# Altium PCB XPIMU_1V1.PCBDOC (part 2 of 3)
Units mil, origin at the board's own origin, x right, y up, seen from the top; angles counter-clockwise.
Board outline 1578.8 x 1145.73 mil, 6 copper layers (Top Layer, Internal Plane 1, Mid-Layer 1, Mid-Layer 2, Mid-Layer 3, Bottom Layer); 139 components, 101 nets, 532 pads, 256 vias.
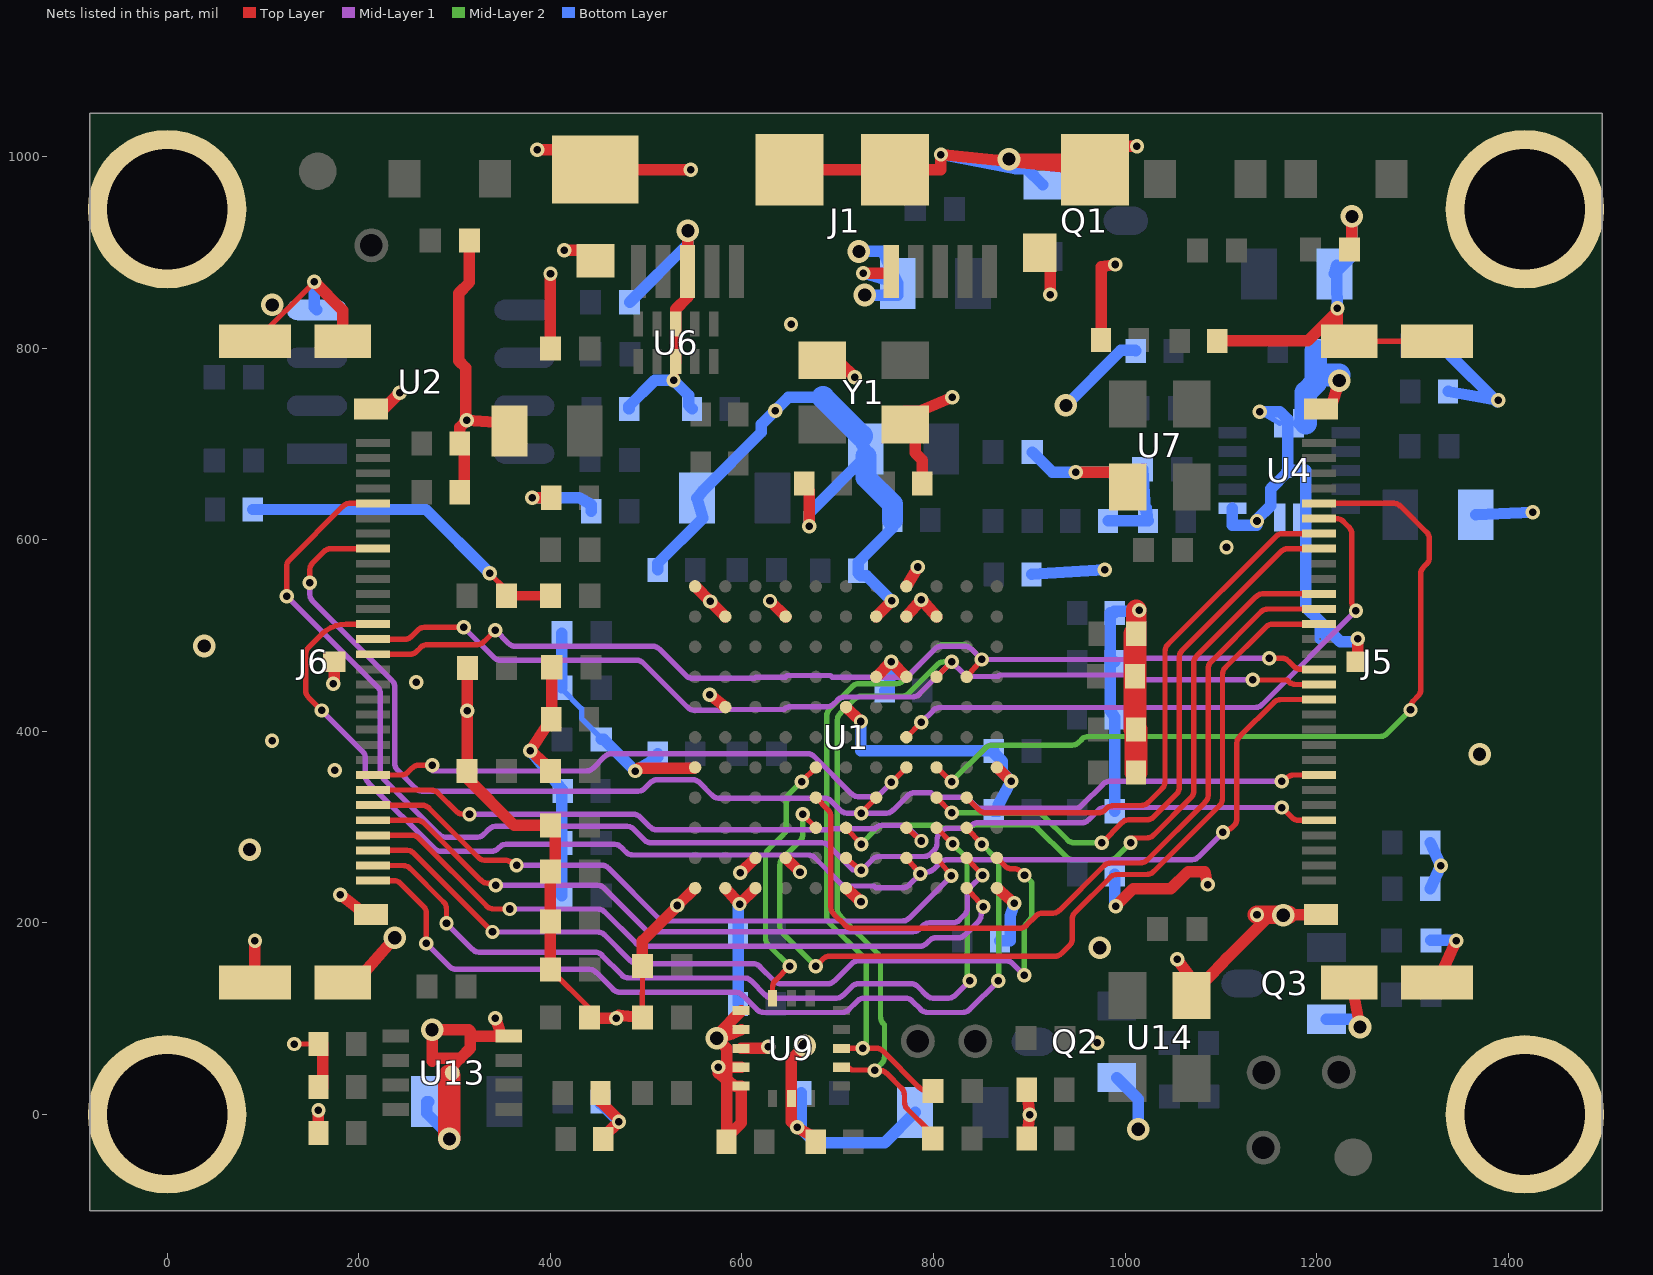
[diagram p6: the nets of this part, all layers, seen from the top]

## Via types
v1: diameter 15, hole 7.87, Top Layer to Bottom Layer, 205 vias
v2: diameter 23.62, hole 13.78, Top Layer to Bottom Layer, 41 vias
v3: diameter 0, hole 0, Top Layer to Bottom Layer, 6 vias
v4: diameter 19, hole 9.84, Top Layer to Bottom Layer, 4 vias

## Nets (pads, with @x,y where several pads share a name; then routed paths per layer and width w, separated by ;. In a path a pad name is that pad's centre, name@x,y a point inside that pad or via, vN(x,y) a via of type N, cw(c..) or ccw(c..) an arc to the next point about the centre after c; other vN are vias at no path point) (continued)
CMOS_D4: J5.26 U1.G9 | length 847.1
  Top Layer w5.6: U1.G9@803.15,362.2 v1(818.9,347.38) ; J5.26@1202.39,637.8 1280.6,637.8 cw(c1280.6,628) 1287.53,634.92 1314.79,607.67 cw(c1307.86,600.74) 1317.66,600.74 1317.66,581.5 cw(c1307.86,581.5) 1314.79,574.57 1311.53,571.31 ccw(c1318.46,564.38) 1308.66,564.38 1308.66,443.5 cw(c1298.86,443.5) 1305.79,436.57 1300.79,431.57 ccw(c1307.72,424.64) 1297.92,424.64 v1(1297.92,422.2)
  Mid-Layer 2 w5.6: v1(818.9,347.38) 854.09,382.57 cw(c861.02,375.64) 861.02,385.44 944.6,385.44 ccw(c944.6,395.24) 951.53,388.31 954.79,391.57 cw(c961.72,384.64) 961.72,394.44 1266.1,394.44 ccw(c1266.1,404.24) 1273.03,397.31 v1(1297.92,422.2)
CMOS_D5: J5.25 U1.F8 | length 647.1
  Top Layer w5.6: U1.F8@771.65,393.7 v1(787.4,409.45) ; J5.25@1202.39,622.05 1220.6,622.05 cw(c1220.6,612.25) 1227.53,619.18 1233.79,612.92 cw(c1226.86,605.99) 1236.66,605.99 1236.66,534.24 ccw(c1246.46,534.24) 1239.53,527.32 v1(1240.96,525.88)
  Mid-Layer 1 w5.6: v1(787.4,409.45) 799.79,421.84 cw(c806.72,414.91) 806.72,424.71 1135.73,424.71 ccw(c1135.73,434.51) 1142.66,427.58 v1(1240.96,525.88)
CMOS_D6: J5.24 U1.H10 | length 576.5
  Top Layer w5.6: U1.H10@834.65,330.71 847.57,317.78 ccw(c854.5,324.71) 854.5,314.91 972.17,314.91 ccw(c972.17,324.71) 979.1,317.78 980.89,319.57 cw(c987.82,312.64) 987.82,322.44 1016.85,322.44 ccw(c1016.85,332.24) 1023.78,325.31 1038.79,340.32 ccw(c1031.86,347.25) 1041.66,347.25 1041.66,483.38 cw(c1051.46,483.38) 1044.53,490.31 1157.65,603.43 cw(c1164.58,596.5) 1164.58,606.3 J5.24@1202.39,606.3
CMOS_D7: J5.23 U1.H9 | length 627.4
  Top Layer w5.6: U1.H9@803.15,330.71 v1(819.01,314.9) ; v1(975.66,283.44) 996.79,304.57 cw(c1003.72,297.64) 1003.72,307.44 1022.6,307.44 ccw(c1022.6,317.24) 1029.53,310.31 1053.79,334.57 ccw(c1046.86,341.5) 1056.66,341.5 1056.66,477.38 cw(c1066.46,477.38) 1059.53,484.31 1162.9,587.68 cw(c1169.83,580.75) 1169.83,590.55 J5.23@1202.39,590.55
  Mid-Layer 2 w5.6: v1(819.01,314.9) 907.46,314.9 cw(c907.46,305.1) 914.39,312.03 940.12,286.31 ccw(c947.04,293.24) 947.04,283.44 v1(975.66,283.44)
CMOS_D8: J6.30 U1.J10 | length 924.7
  Top Layer w5.6: J6.30@214.93,244.09 236.6,244.09 cw(c236.6,234.29) 243.53,241.22 267.79,216.96 cw(c260.86,210.04) 270.66,210.04 v1(270.66,178.44) ; U1.J10@834.65,299.21 v1(850.39,282.2)
  Mid-Layer 1 w5.6: v1(270.66,178.44) 294.79,154.31 ccw(c301.72,161.24) 301.72,151.44 440.6,151.44 cw(c440.6,141.64) 447.53,148.57 465.79,130.31 ccw(c472.72,137.24) 472.72,127.44 593.6,127.44 cw(c593.6,117.64) 600.53,124.57 615.79,109.31 ccw(c622.72,116.24) 622.72,106.44 704.6,106.44 ccw(c704.6,116.24) 711.53,109.31 720.79,118.57 cw(c727.72,111.64) 727.72,121.44 770.6,121.44 cw(c770.6,111.64) 777.53,118.57 786.79,109.31 ccw(c793.72,116.24) 793.72,106.44 830.6,106.44 ccw(c830.6,116.24) 837.53,109.31 v1(867.66,139.44)
  Mid-Layer 2 w5.6: v1(850.39,282.2) 865.25,267.35 cw(c858.32,260.42) 868.12,260.42 868.12,139.9 v1(867.66,139.44)
CMOS_D9: J6.29 U1.J9 | length 880.2
  Top Layer w5.6: J6.29@214.93,259.84 246.39,259.84 cw(c246.39,250.04) 253.32,256.97 288.79,221.5 cw(c281.86,214.57) 291.66,214.57 v1(291.66,199.44) ; U1.J9@803.15,299.21 v1(819.9,282.43)
  Mid-Layer 1 w5.6: v1(291.66,199.44) 318.79,172.31 ccw(c325.72,179.24) 325.72,169.44 446.6,169.44 cw(c446.6,159.64) 453.53,166.57 474.79,145.31 ccw(c481.72,152.24) 481.72,142.44 602.6,142.44 cw(c602.6,132.64) 609.53,139.57 624.79,124.31 ccw(c631.72,131.24) 631.72,121.44 698.6,121.44 ccw(c698.6,131.24) 705.53,124.31 714.79,133.57 cw(c721.72,126.64) 721.72,136.44 776.6,136.44 cw(c776.6,126.64) 783.53,133.57 792.79,124.31 ccw(c799.72,131.24) 799.72,121.44 815.6,121.44 ccw(c815.6,131.24) 822.53,124.31 v1(837.66,139.44)
  Mid-Layer 2 w5.6: v1(819.9,282.43) 834.93,267.4 834.93,235.18 835.39,234.71 835.39,141.71 v1(837.66,139.44)
CMOS_D10: J6.28 U1.K11 | length 895.5
  Top Layer w5.6: J6.28@214.93,275.59 250.45,275.59 cw(c250.45,265.79) 257.38,272.72 v1(339.66,190.44) ; U1.K11@866.14,267.72 874.55,259.31 ccw(c881.48,266.24) 881.48,256.44 884.08,256.44 cw(c884.08,246.64) 891.01,253.57 v1(895.01,249.58)
  Mid-Layer 1 w5.6: v1(339.66,190.44) 449.6,190.44 cw(c449.6,180.64) 456.53,187.57 483.79,160.31 ccw(c490.72,167.24) 490.72,157.44 611.6,157.44 cw(c611.6,147.64) 618.53,154.57 633.79,139.31 ccw(c640.72,146.24) 640.72,136.44 689.6,136.44 ccw(c689.6,146.24) 696.53,139.31 714.79,157.57 cw(c721.72,150.64) 721.72,160.44 875.6,160.44 cw(c875.6,150.64) 882.53,157.57 v1(894.66,145.44)
  Mid-Layer 2 w5.6: v1(894.66,145.44) 894.66,193.02 cw(c904.46,193.02) 897.53,199.95 899.85,202.27 ccw(c892.92,209.2) 902.72,209.2 902.72,241.86 v1(895.01,249.58)
CMOS_D11: J6.27 U1.L10 | length 730.8
  Top Layer w5.6: J6.27@214.93,291.34 255.7,291.34 cw(c255.7,281.54) 262.63,288.47 333.79,217.31 ccw(c340.72,224.24) 340.72,214.44 v1(357.66,214.44) ; U1.L10@834.65,236.22 v1(851.88,216.73)
  Mid-Layer 1 w5.6: v1(357.66,214.44) 449.6,214.44 cw(c449.6,204.64) 456.53,211.57 489.79,178.31 ccw(c496.72,185.24) 496.72,175.44 785.6,175.44 ccw(c785.6,185.24) 792.53,178.31 795.79,181.57 cw(c802.72,174.64) 802.72,184.44 825.88,184.44 ccw(c825.88,194.24) 832.81,187.31 846.79,201.29 ccw(c839.86,208.22) 849.66,208.22 849.66,214.51 v1(851.88,216.73)
CMOS_D12: J6.26 U1.K10 | length 742.7
  Top Layer w5.6: J6.26@214.93,307.09 260.96,307.09 cw(c260.96,297.29) 267.89,304.22 327.79,244.31 ccw(c334.72,251.24) 334.72,241.44 340.73,241.44 v1(343.07,239.1) ; U1.K10@834.65,267.72 v1(851.16,249.67)
  Mid-Layer 1 w5.6: v1(343.07,239.1) 449.21,239.1 cw(c449.21,229.3) 456.14,236.23 498.75,193.62 ccw(c505.68,200.55) 505.68,190.75 778.65,190.75 ccw(c778.65,200.55) 785.58,193.62 788.97,197.02 cw(c795.9,190.09) 795.9,199.89 819.95,199.89 ccw(c819.95,209.69) 826.88,202.76 832.52,208.4 ccw(c825.59,215.33) 835.39,215.33 835.39,229.84 cw(c845.19,229.84) 838.26,236.77 v1(851.16,249.67)
CMOS_D13: J6.25 U1.K9 | length 696.3
  Top Layer w5.6: J6.25@214.93,322.83 266.21,322.83 cw(c266.21,313.03) 273.14,319.96 324.79,268.31 ccw(c331.72,275.24) 331.72,265.44 352.79,265.44 cw(c352.79,255.64) 359.72,262.57 363.46,258.83 v1(364.78,260.15) ; U1.K9@803.15,267.72 v1(818.69,249.01)
  Mid-Layer 1 w5.6: v1(364.78,260.15) 453.74,260.15 cw(c453.74,250.35) 460.67,257.28 513.22,204.72 ccw(c520.15,211.65) 520.15,201.85 767.48,201.85 ccw(c767.48,211.65) 774.41,204.72 v1(818.69,249.01)
CMOS_D14: J6.24 U1.J8 | length 616.6
  Top Layer w5.6: J6.24@214.93,338.58 275.6,338.58 cw(c275.6,328.78) 282.53,335.71 301.93,316.31 ccw(c308.86,323.24) 308.86,313.44 v1(315.66,313.44) ; U1.J8@771.65,299.21 v1(787.42,285.42)
  Mid-Layer 1 w5.6: v1(315.66,313.44) 486.6,313.44 cw(c486.6,303.64) 493.53,310.57 504.03,300.07 ccw(c510.96,307) 510.96,297.2 693.53,297.2 694.62,298.29 738.77,298.29 739.27,298.79 cw(c746.2,291.86) 746.2,301.66 767.13,301.66 cw(c767.13,291.86) 774.05,298.79 v1(787.42,285.42)
CMOS_D15: J6.23 U1.G8 | length 602.3
  Top Layer w5.6: J6.23@214.93,354.33 244.49,354.33 ccw(c244.49,364.13) 251.42,357.2 255.79,361.57 cw(c262.72,354.64) 262.72,364.44 v1(276.66,364.44) ; v1(756.1,346.56) U1.G8@771.65,362.2 U1.G8@771.65,362.2
  Mid-Layer 1 w5.6: v1(276.66,364.44) 277.22,363.88 277.22,358.44 437.6,358.44 ccw(c437.6,368.24) 444.53,361.31 456.79,373.57 cw(c463.72,366.64) 463.72,376.44 668.6,376.44 cw(c668.6,366.64) 675.53,373.57 714.47,334.63 ccw(c721.4,341.56) 721.4,331.76 737.24,331.76 ccw(c737.24,341.56) 744.17,334.63 v1(756.1,346.56)
CMOS_HD: J5.18 U1.J5 | length 969.7
  Top Layer w5.6: v1(663.66,313.44) 663.66,312.72 U1.J5@677.17,299.21 ; v1(677.05,154.75) 684.47,162.17 cw(c691.4,155.24) 691.4,165.04 926.62,165.04 ccw(c926.62,174.84) 933.55,167.91 941.99,176.35 ccw(c935.06,183.28) 944.86,183.28 944.86,203.79 cw(c954.66,203.79) 947.73,210.72 984.58,247.57 cw(c991.51,240.64) 991.51,250.44 1022.6,250.44 ccw(c1022.6,260.24) 1029.53,253.31 1098.79,322.57 ccw(c1091.86,329.5) 1101.66,329.5 1101.66,459.38 cw(c1111.46,459.38) 1104.53,466.31 1147.16,508.94 cw(c1154.09,502.01) 1154.09,511.81 J5.18@1202.39,511.81
  Mid-Layer 2 w5.6: v1(663.66,313.44) 663.66,292.31 cw(c653.86,292.31) 660.79,285.38 642.53,267.12 ccw(c649.46,260.19) 639.66,260.19 639.66,196.2 ccw(c649.46,196.2) 642.53,189.27 v1(677.05,154.75)
CMOS_OE: J5.8 J6.8 U1.H7 | length 1450.7
  Top Layer w5.6: v1(149.08,554.88) 149.08,568.8 ; J6.8@214.93,590.55 170.83,590.55 ; v1(724.72,314.55) U1.H7@740.16,330.71 ; v1(1163.33,347.96) 1171.3,352.87 cw(c1176.44,344.53) 1176.44,354.33 J5.8@1202.39,354.33 ; 149.08,568.8 cw(c158.88,568.8) 151.95,575.73 ; 149.08,568.8 cw(c158.88,568.8) 151.95,575.73 ; 151.95,575.73 163.9,587.68 ; 163.9,587.68 cw(c170.83,580.75) 170.83,590.55 ; 163.9,587.68 cw(c170.83,580.75) 170.83,590.55
  Mid-Layer 1 w5.6: v1(149.08,554.88) 149.08,542.73 ; v1(1163.33,347.96) 984.24,347.96 ccw(c984.24,338.16) 977.31,345.09 954.53,322.31 cw(c947.6,329.24) 947.6,319.44 850.35,319.44 cw(c850.35,329.24) 843.42,322.31 837.46,328.27 ccw(c830.53,321.34) 830.53,331.14 806.02,331.14 cw(c806.02,340.94) 799.09,334.01 797.23,335.87 780.15,335.87 ccw(c780.15,326.07) 773.22,333 757.64,317.42 cw(c750.71,324.35) 750.71,314.55 v1(724.72,314.55) 709.72,314.55 ; 149.08,542.73 ccw(c158.88,542.73) 151.95,535.8 ; 149.08,542.73 ccw(c158.88,542.73) 151.95,535.8 ; 151.95,535.8 234.79,452.96 ; 234.79,452.96 cw(c227.86,446.03) 237.66,446.03 ; 234.79,452.96 cw(c227.86,446.03) 237.66,446.03 ; 237.66,366.28 ccw(c247.46,366.28) 240.53,359.35 ; 237.66,366.28 ccw(c247.46,366.28) 240.53,359.35 ; 237.66,366.28 237.66,446.03 ; 240.53,359.35 259.57,340.31 ; 259.57,340.31 ccw(c266.5,347.24) 266.5,337.44 ; 259.57,340.31 ccw(c266.5,347.24) 266.5,337.44 ; 266.5,337.44 491.6,337.44 ; 491.6,337.44 ccw(c491.6,347.24) 498.53,340.31 ; 491.6,337.44 ccw(c491.6,347.24) 498.53,340.31 ; 498.53,340.31 504.79,346.57 ; 504.79,346.57 cw(c511.72,339.64) 511.72,349.44 ; 504.79,346.57 cw(c511.72,339.64) 511.72,349.44 ; 511.72,349.44 548.6,349.44 ; 548.6,349.44 cw(c548.6,339.64) 555.53,346.57 ; 548.6,349.44 cw(c548.6,339.64) 555.53,346.57 ; 555.53,346.57 569.05,333.05 ; 569.05,333.05 ccw(c575.98,339.98) 575.98,330.18 ; 569.05,333.05 ccw(c575.98,339.98) 575.98,330.18 ; 575.98,330.18 685.97,330.18 ; 685.97,330.18 cw(c685.97,320.38) 692.9,327.31 ; 685.97,330.18 cw(c685.97,320.38) 692.9,327.31 ; 692.9,327.31 702.79,317.42 ; 702.79,317.42 ccw(c709.72,324.35) 709.72,314.55 ; 702.79,317.42 ccw(c709.72,324.35) 709.72,314.55
CMOS_PCLK: J5.20 U1.J6 | length 723.9
  Top Layer w5.6: U1.J6@708.66,299.21 v1(724.46,282.02) ; v1(1005.66,283.44) 1005.66,288.54 1022.6,288.54 ccw(c1022.6,298.34) 1029.53,291.41 1068.79,330.67 ccw(c1061.86,337.6) 1071.66,337.6 1071.66,471.38 cw(c1081.46,471.38) 1074.53,478.31 1136.66,540.44 cw(c1143.59,533.51) 1143.59,543.31 J5.20@1202.39,543.31
  Mid-Layer 2 w5.6: v1(724.46,282.02) 741.23,298.79 cw(c748.16,291.86) 748.16,301.66 801.72,301.66 801.84,301.54 ccw(c808.77,308.47) 808.77,298.67 836.2,298.67 836.73,299.19 cw(c843.66,292.26) 843.66,302.06 901.25,302.06 cw(c901.25,292.26) 908.18,299.19 938.68,268.69 ccw(c945.61,275.62) 945.61,265.82 983.99,265.82 ccw(c983.99,275.62) 990.91,268.69 v1(1005.66,283.44)
CMOS_RST: J5.13 J6.13 U1.K8 | length 1554.9
  Top Layer w5.6: v1(161.25,421.68) 147.53,435.39 ; J6.13@214.93,511.81 186.78,511.81 ; U1.K8@771.65,267.72 v1(786.22,251.04) ; v1(1102.16,294.35) 1109.91,298.35 ccw(c1105.42,307.06) 1112.35,300.13 1113.79,301.57 ccw(c1106.86,308.5) 1116.66,308.5 1116.66,387.38 cw(c1126.46,387.38) 1119.53,394.31 1155.42,430.2 cw(c1162.35,423.27) 1162.35,433.07 J5.13@1202.39,433.07 ; 144.66,442.32 ccw(c154.46,442.32) 147.53,435.39 ; 144.66,442.32 ccw(c154.46,442.32) 147.53,435.39 ; 144.66,442.32 144.66,480.38 ; 144.66,480.38 cw(c154.46,480.38) 147.53,487.31 ; 144.66,480.38 cw(c154.46,480.38) 147.53,487.31 ; 147.53,487.31 161.6,501.38 ; 161.6,501.38 cw(c186.78,476.19) 186.78,511.81 ; 161.6,501.38 cw(c186.78,476.19) 186.78,511.81
  Mid-Layer 1 w5.6: v1(161.25,421.68) 204.14,378.78 ; v1(1102.16,294.35) 1076.61,268.81 cw(c1069.68,275.74) 1069.68,265.94 814.08,265.94 ccw(c814.08,256.14) 807.15,263.07 799.93,255.85 cw(c793,262.78) 795.32,253.26 v1(786.22,251.04) 774.58,239.4 ; 204.14,378.78 cw(c197.21,371.85) 207.01,371.85 ; 204.14,378.78 cw(c197.21,371.85) 207.01,371.85 ; 207.01,353.5 ccw(c216.81,353.5) 209.88,346.57 ; 207.01,353.5 ccw(c216.81,353.5) 209.88,346.57 ; 207.01,353.5 207.01,371.85 ; 209.88,346.57 278.93,277.52 ; 278.93,277.52 ccw(c285.86,284.45) 285.86,274.65 ; 278.93,277.52 ccw(c285.86,284.45) 285.86,274.65 ; 285.86,274.65 338.53,274.65 ; 338.53,274.65 ccw(c338.53,284.45) 345.46,277.52 ; 338.53,274.65 ccw(c338.53,284.45) 345.46,277.52 ; 345.46,277.52 346.97,279.03 ; 346.97,279.03 cw(c353.9,272.1) 353.9,281.9 ; 346.97,279.03 cw(c353.9,272.1) 353.9,281.9 ; 353.9,281.9 466.9,281.9 ; 466.9,281.9 cw(c466.9,272.1) 473.83,279.03 ; 466.9,281.9 cw(c466.9,272.1) 473.83,279.03 ; 473.83,279.03 479.21,273.66 ; 479.21,273.66 ccw(c486.14,280.59) 486.14,270.79 ; 479.21,273.66 ccw(c486.14,280.59) 486.14,270.79 ; 486.14,270.79 669.13,270.79 ; 669.13,270.79 cw(c669.13,260.99) 676.06,267.92 ; 669.13,270.79 cw(c669.13,260.99) 676.06,267.92 ; 676.06,267.92 702.71,241.27 ; 702.71,241.27 ccw(c709.64,248.2) 709.64,238.4 ; 702.71,241.27 ccw(c709.64,248.2) 709.64,238.4 ; 709.64,238.4 738.03,238.4 739.9,236.53 767.65,236.53 ; 767.65,236.53 ccw(c767.65,246.33) 774.58,239.4 ; 767.65,236.53 ccw(c767.65,246.33) 774.58,239.4
CMOS_VD: J5.19 U1.H5 | length 857.5
  Top Layer w5.6: U1.H5@677.17,330.71 690.06,317.82 cw(c683.13,310.89) 692.93,310.89 692.93,216.23 ccw(c702.73,216.23) 695.8,209.3 707.99,197.12 ccw(c714.92,204.05) 714.92,194.25 889.83,194.25 ccw(c889.83,204.05) 896.76,197.12 906.93,207.29 cw(c913.86,200.36) 913.86,210.16 924.57,210.16 ccw(c924.57,219.96) 931.5,213.03 978.04,259.57 cw(c984.97,252.64) 984.97,262.44 1015.84,262.44 ccw(c1015.84,272.24) 1022.77,265.31 1083.79,326.33 ccw(c1076.86,333.26) 1086.66,333.26 1086.66,465.38 cw(c1096.46,465.38) 1089.53,472.31 1141.91,524.69 cw(c1148.84,517.76) 1148.84,527.56 J5.19@1202.39,527.56
EXPOSURE: J5.5 J6.5 U1.K6 | length 1537.8
  Top Layer w5.6: v1(124.74,541.07) 124.74,571.81 ; J6.5@214.93,637.8 190.72,637.8 ; U1.K6@708.66,267.72 v1(724.72,254.63) ; v1(1163.66,320.34) 1174.04,309.96 ccw(c1180.97,316.89) 1180.97,307.09 J5.5@1202.39,307.09 ; 124.74,571.81 cw(c134.54,571.81) 127.61,578.74 ; 124.74,571.81 cw(c134.54,571.81) 127.61,578.74 ; 127.61,578.74 183.79,634.92 ; 183.79,634.92 cw(c190.72,628) 190.72,637.8 ; 183.79,634.92 cw(c190.72,628) 190.72,637.8
  Mid-Layer 1 w5.6: v1(124.74,541.07) 219.79,446.01 ; 839.44,301.54 cw(c832.51,308.47) 832.51,298.67 815.36,298.67 ccw(c815.36,288.87) 808.43,295.8 806.53,293.89 ccw(c813.46,286.96) 803.66,286.96 803.66,282.75 cw(c793.86,282.75) 800.79,275.82 797.02,272.05 cw(c790.09,278.98) 790.09,269.18 743.33,269.18 ccw(c743.33,259.38) 736.4,266.31 v1(724.72,254.63) 723.91,255.45 715.65,255.45 690.53,280.57 ; 839.48,301.57 cw(c846.41,294.64) 846.41,304.44 954.76,304.44 ccw(c954.76,314.24) 961.69,307.31 971.85,317.46 cw(c978.77,310.54) 978.77,320.34 v1(1163.66,320.34) ; 219.79,446.01 cw(c212.86,439.09) 222.66,439.09 ; 219.79,446.01 cw(c212.86,439.09) 222.66,439.09 ; 222.66,357.68 ccw(c232.46,357.68) 225.53,350.75 ; 222.66,357.68 ccw(c232.46,357.68) 225.53,350.75 ; 222.66,357.68 222.66,439.09 ; 225.53,350.75 283.97,292.31 ; 283.97,292.31 ccw(c290.9,299.24) 290.9,289.44 ; 283.97,292.31 ccw(c290.9,299.24) 290.9,289.44 ; 290.9,289.44 323.6,289.44 ; 323.6,289.44 ccw(c323.6,299.24) 330.53,292.31 ; 323.6,289.44 ccw(c323.6,299.24) 330.53,292.31 ; 330.53,292.31 335.97,297.75 ; 335.97,297.75 cw(c342.9,290.82) 342.9,300.62 ; 335.97,297.75 cw(c342.9,290.82) 342.9,300.62 ; 342.9,300.62 480.12,300.62 ; 480.12,300.62 cw(c480.12,290.82) 487.05,297.75 ; 480.12,300.62 cw(c480.12,290.82) 487.05,297.75 ; 487.05,297.75 498.49,286.31 ; 498.49,286.31 ccw(c505.42,293.24) 505.42,283.44 ; 498.49,286.31 ccw(c505.42,293.24) 505.42,283.44 ; 505.42,283.44 683.6,283.44 ; 683.6,283.44 cw(c683.6,273.64) 690.53,280.57 ; 683.6,283.44 cw(c683.6,273.64) 690.53,280.57
FX3_SCL: J5.14 J6.14 R26.2 U1.D9 U9.2 | length 2016.4
  Top Layer w5.6: J6.14@214.93,496.06 248.22,496.06 ; v1(309.66,508.44) 268.72,508.44 ; U9.2@704.02,49.21 707.83,49.21 cw(c707.83,39.41) 714.76,46.34 738.27,46.34 v1(738.72,45.89) 744.04,45.89 cw(c744.04,36.09) 750.97,43.02 766.85,27.14 cw(c759.92,20.21) 769.72,20.21 769.72,12.76 ccw(c779.52,12.76) 772.59,5.83 795.79,-17.38 cw(c788.86,-24.31) 798.66,-24.31 798.66,-24.7 R26.2@799.2,-25.23 ; U1.D9@803.15,456.69 v1(818.9,472.44) ; v1(1133.42,453.85) 1133.42,453.44 1169.04,453.44 1170.79,451.69 ccw(c1177.72,458.62) 1177.72,448.82 J5.14@1202.39,448.82 ; 248.22,496.06 ccw(c248.22,505.86) 255.15,498.93 ; 248.22,496.06 ccw(c248.22,505.86) 255.15,498.93 ; 248.22,496.06 ccw(c248.22,505.86) 255.15,498.93 ; 248.22,496.06 ccw(c248.22,505.86) 255.15,498.93 ; 255.15,498.93 261.79,505.57 ; 261.79,505.57 cw(c268.72,498.64) 268.72,508.44 ; 261.79,505.57 cw(c268.72,498.64) 268.72,508.44 ; 261.79,505.57 cw(c268.72,498.64) 268.72,508.44 ; 261.79,505.57 cw(c268.72,498.64) 268.72,508.44
  Mid-Layer 1 w5.6: v1(309.66,508.44) 341.09,477.01 ; v1(1133.42,453.85) 1020.22,453.85 cw(c1020.22,463.65) 1013.29,456.72 1011.34,458.68 869.08,458.68 867.59,457.18 838.22,457.18 cw(c838.22,466.98) 831.29,460.05 v1(818.9,472.44) 785.07,438.61 ; 341.09,477.01 ccw(c348.02,483.94) 348.02,474.14 ; 341.09,477.01 ccw(c348.02,483.94) 348.02,474.14 ; 341.09,477.01 ccw(c348.02,483.94) 348.02,474.14 ; 341.09,477.01 ccw(c348.02,483.94) 348.02,474.14 ; 348.02,474.14 490.1,474.14 ; 490.1,474.14 cw(c490.1,464.34) 497.03,471.27 ; 490.1,474.14 cw(c490.1,464.34) 497.03,471.27 ; 490.1,474.14 cw(c490.1,464.34) 497.03,471.27 ; 490.1,474.14 cw(c490.1,464.34) 497.03,471.27 ; 497.03,471.27 543.47,424.84 ; 543.47,424.84 ccw(c550.4,431.77) 550.4,421.97 ; 543.47,424.84 ccw(c550.4,431.77) 550.4,421.97 ; 543.47,424.84 ccw(c550.4,431.77) 550.4,421.97 ; 543.47,424.84 ccw(c550.4,431.77) 550.4,421.97 ; 550.4,421.97 582.91,421.97 583.66,422.71 644.04,422.71 644.14,422.82 ; 644.14,422.82 cw(c651.07,415.89) 651.07,425.69 ; 644.14,422.82 cw(c651.07,415.89) 651.07,425.69 ; 644.14,422.82 cw(c651.07,415.89) 651.07,425.69 ; 644.14,422.82 cw(c651.07,415.89) 651.07,425.69 ; 651.07,425.69 688.93,425.69 ; 688.93,425.69 ccw(c688.93,435.49) 695.86,428.56 ; 688.93,425.69 ccw(c688.93,435.49) 695.86,428.56 ; 688.93,425.69 ccw(c688.93,435.49) 695.86,428.56 ; 688.93,425.69 ccw(c688.93,435.49) 695.86,428.56 ; 695.86,428.56 700.17,432.87 ; 700.17,432.87 cw(c707.1,425.94) 707.1,435.74 ; 700.17,432.87 cw(c707.1,425.94) 707.1,435.74 ; 700.17,432.87 cw(c707.1,425.94) 707.1,435.74 ; 700.17,432.87 cw(c707.1,425.94) 707.1,435.74 ; 707.1,435.74 778.14,435.74 ; 778.14,435.74 ccw(c778.14,445.54) 785.07,438.61 ; 778.14,435.74 ccw(c778.14,445.54) 785.07,438.61 ; 778.14,435.74 ccw(c778.14,445.54) 785.07,438.61 ; 778.14,435.74 ccw(c778.14,445.54) 785.07,438.61
  Mid-Layer 2 w5.6: v1(738.72,45.89) 745.92,53.09 ; v1(818.9,472.44) 811.03,472.44 ; 699.66,214.14 ccw(c709.46,214.14) 702.53,207.21 ; 699.66,214.14 ccw(c709.46,214.14) 702.53,207.21 ; 699.66,214.14 699.66,411.38 ; 699.66,411.38 cw(c709.46,411.38) 702.53,418.31 ; 699.66,411.38 cw(c709.46,411.38) 702.53,418.31 ; 702.53,207.21 741.79,167.95 ; 702.53,418.31 717.79,433.57 ; 717.79,433.57 cw(c724.72,426.64) 724.72,436.44 ; 717.79,433.57 cw(c724.72,426.64) 724.72,436.44 ; 724.72,436.44 766.91,436.44 ; 741.79,167.95 cw(c734.86,161.02) 744.66,161.02 ; 741.79,167.95 cw(c734.86,161.02) 744.66,161.02 ; 744.66,101.77 ccw(c754.46,101.77) 747.53,94.84 ; 744.66,101.77 ccw(c754.46,101.77) 747.53,94.84 ; 744.66,101.77 744.66,161.02 ; 745.92,53.09 ccw(c738.99,60.02) 748.79,60.02 ; 745.92,53.09 ccw(c738.99,60.02) 748.79,60.02 ; 747.53,94.84 748.79,93.59 748.79,60.02 ; 766.91,436.44 ccw(c766.91,446.24) 773.84,439.31 ; 766.91,436.44 ccw(c766.91,446.24) 773.84,439.31 ; 773.84,439.31 804.1,469.57 ; 804.1,469.57 cw(c811.03,462.64) 811.03,472.44 ; 804.1,469.57 cw(c811.03,462.64) 811.03,472.44
FX3_SDA: J5.15 J6.15 R25.2 U1.D10 U9.3 | length 2005.3
  Top Layer w5.6: J6.15@214.93,480.31 253.48,480.31 ; v1(342.66,505.44) 330.53,493.31 ; U9.3@704.02,68.9 725.85,68.9 v1(726.05,69.09) 740.2,69.09 cw(c740.2,59.29) 747.13,66.22 785.04,28.31 ccw(c791.97,35.24) 791.97,25.44 R25.2@799.46,24.54 ; U1.D10@834.65,456.69 v1(850.39,474.92) ; v1(1150.52,476.22) 1163.6,476.22 cw(c1163.6,466.42) 1170.53,473.35 1176.44,467.44 ccw(c1183.37,474.37) 1183.37,464.57 J5.15@1202.39,464.57 ; 253.48,480.31 ccw(c253.48,490.11) 260.41,483.19 ; 253.48,480.31 ccw(c253.48,490.11) 260.41,483.19 ; 253.48,480.31 ccw(c253.48,490.11) 260.41,483.19 ; 253.48,480.31 ccw(c253.48,490.11) 260.41,483.19 ; 260.41,483.19 264.79,487.57 ; 264.79,487.57 cw(c271.72,480.64) 271.72,490.44 ; 264.79,487.57 cw(c271.72,480.64) 271.72,490.44 ; 264.79,487.57 cw(c271.72,480.64) 271.72,490.44 ; 264.79,487.57 cw(c271.72,480.64) 271.72,490.44 ; 271.72,490.44 323.6,490.44 ; 323.6,490.44 ccw(c323.6,500.24) 330.53,493.31 ; 323.6,490.44 ccw(c323.6,500.24) 330.53,493.31 ; 323.6,490.44 ccw(c323.6,500.24) 330.53,493.31 ; 323.6,490.44 ccw(c323.6,500.24) 330.53,493.31
  Mid-Layer 1 w5.6: v1(342.66,505.44) 356.52,491.58 ; v1(1150.52,476.22) 1001.11,476.22 999.8,474.92 v1(850.39,474.92) 839.5,485.81 ; 356.52,491.58 ccw(c363.45,498.51) 363.45,488.71 ; 356.52,491.58 ccw(c363.45,498.51) 363.45,488.71 ; 356.52,491.58 ccw(c363.45,498.51) 363.45,488.71 ; 356.52,491.58 ccw(c363.45,498.51) 363.45,488.71 ; 363.45,488.71 506.85,488.71 ; 506.85,488.71 cw(c506.85,478.91) 513.78,485.84 ; 506.85,488.71 cw(c506.85,478.91) 513.78,485.84 ; 506.85,488.71 cw(c506.85,478.91) 513.78,485.84 ; 506.85,488.71 cw(c506.85,478.91) 513.78,485.84 ; 513.78,485.84 541.6,458.02 ; 541.6,458.02 ccw(c548.53,464.95) 548.53,455.15 ; 541.6,458.02 ccw(c548.53,464.95) 548.53,455.15 ; 541.6,458.02 ccw(c548.53,464.95) 548.53,455.15 ; 541.6,458.02 ccw(c548.53,464.95) 548.53,455.15 ; 548.53,455.15 583.62,455.15 583.66,455.19 613.08,455.19 614.21,456.31 645.16,456.31 647.01,458.16 692.42,458.16 694.38,456.2 767.84,456.2 ; 767.84,456.2 ccw(c767.84,466) 774.77,459.07 ; 767.84,456.2 ccw(c767.84,466) 774.77,459.07 ; 767.84,456.2 ccw(c767.84,466) 774.77,459.07 ; 767.84,456.2 ccw(c767.84,466) 774.77,459.07 ; 774.77,459.07 801.5,485.81 ; 801.5,485.81 cw(c808.43,478.88) 808.43,488.68 ; 801.5,485.81 cw(c808.43,478.88) 808.43,488.68 ; 801.5,485.81 cw(c808.43,478.88) 808.43,488.68 ; 801.5,485.81 cw(c808.43,478.88) 808.43,488.68 ; 808.43,488.68 832.57,488.68 ; 832.57,488.68 cw(c832.57,478.88) 839.5,485.81 ; 832.57,488.68 cw(c832.57,478.88) 839.5,485.81 ; 832.57,488.68 cw(c832.57,478.88) 839.5,485.81 ; 832.57,488.68 cw(c832.57,478.88) 839.5,485.81
  Mid-Layer 2 w5.6: v1(726.05,69.09) 729.66,69.09 729.66,157.28 ; v1(850.39,474.92) 837.66,487.65 ; 688.56,206.49 ccw(c698.36,206.49) 691.43,199.56 ; 688.56,206.49 ccw(c698.36,206.49) 691.43,199.56 ; 688.56,206.49 688.56,415.98 ; 688.56,415.98 cw(c698.36,415.98) 691.43,422.91 ; 688.56,415.98 cw(c698.36,415.98) 691.43,422.91 ; 691.43,199.56 726.79,164.21 ; 691.43,422.91 715.39,446.87 ; 715.39,446.87 cw(c722.32,439.94) 722.32,449.74 ; 715.39,446.87 cw(c722.32,439.94) 722.32,449.74 ; 722.32,449.74 761.37,449.74 ; 726.79,164.21 cw(c719.86,157.28) 729.66,157.28 ; 726.79,164.21 cw(c719.86,157.28) 729.66,157.28 ; 761.37,449.74 ccw(c761.37,459.54) 768.3,452.61 ; 761.37,449.74 ccw(c761.37,459.54) 768.3,452.61 ; 768.3,452.61 803.34,487.65 ; 803.34,487.65 cw(c810.27,480.72) 810.27,490.52 ; 803.34,487.65 cw(c810.27,480.72) 810.27,490.52 ; 810.27,490.52 830.73,490.52 ; 830.73,490.52 cw(c830.73,480.72) 837.66,487.65 ; 830.73,490.52 cw(c830.73,480.72) 837.66,487.65
G_FSYNC: U1.G5 U9.8 | length 278.4
  Top Layer w5.6: U9.8@631.98,121.26 631.98,132.82 cw(c641.78,132.82) 634.85,139.75 v1(649.85,154.75) ; v1(662.29,347.33) U1.G5@677.17,362.2
  Mid-Layer 2 w5.6: v1(649.85,154.75) 627.53,177.07 cw(c634.46,184) 624.66,184 624.66,269.42 cw(c634.46,269.42) 627.53,276.35 643.47,292.29 ccw(c636.54,299.22) 646.34,299.22 646.34,327.32 cw(c656.14,327.32) 649.21,334.25 v1(662.29,347.33)
GND: C1.1 C2.2 C3.1 C4.1 C5.1 C6.1 C7.1 C8.1 C9.1 C10.1 C11.1 C12.1 C13.1 C14.1 C15.1 C16.1 C17.1 C18.2 C19.1 C20.2 C21.1 C22.1 C23.1 C24.1 C25.1 C26.1 C27.1 C28.1 C29.1 C30.2 C31.1 C32.2 C33.1 C34.1 C35.1 C36.2 C37.1 C38.1 C39.1 C40.2 C43.1 C49.1 C50.2 C51.1 C52.1 C53.1 C54.1 C55.2 C56.2 C57.1 C58.1 C59.1 C60.1 C67.1 C94.1 C95.1 C96.1 C97.1 C98.1 H1.1 H2.1 H3.1 H4.1 J1.5 J1.8 J1.11 J1.12 J1.13 J1.14 J1.15 J1.16 J5.33 J5.34 J5.35 J5.36 J5.37 J5.38 J5.39 J6.33 J6.34 J6.35 J6.36 J6.37 J6.38 J6.39 Q1.2 Q2.2 Q3.2 R4.1 R7.2 R8.2 R10.2 R11.2 R12.2 R16.2 R17.2 R18.2 R19.2 R20.2 R21.2 R28.2 R29.2 R30.2 R31.2 R32.2 R33.2 R35.2 R36.2 R37.2 R53.2 R58.1 R61.1 R63.1 R67.1 U1.A1 U1.A8 U1.B2 U1.B4 U1.B7 U1.B8 U1.B9 U1.D7 U1.D8 U1.E2 U1.E6 U1.G1 U1.G11 U1.K3 U1.K4 U1.L1 U1.L2 U1.L3 U1.L6 U1.L11 U2.4 U4.6 U4.11 U4.12 U4.13 U4.14 U4.15 U6.3 U6.8 U7.2 U9.9 U9.10 U9.11 U9.12 U9.13 U9.15 U13.8 U13.9 U14.2 Y1.2 Y1.4 | length 9895.4
  Top Layer w5.6: J6.36@91.7,807.09 v1(153.66,869.05) ; v1(132.66,73.44) 155.57,73.44 C16.1@157.98,73.44 ; v1(336.66,564.91) 354.13,547.44 R30.2@354.13,541.44 ; R10.2@400.19,151.44 442.19,109.44 442.19,104.5 R53.2@441.1,101.11 R53.2@444.94,103.03 ; R8.2@496.16,101.11 R7.2@496.22,154.86 R7.2@496.19,154.44 ; v1(528.66,766.44) 531.06,769.44 U6.8@531.06,785.76 ; J5.34@1233.89,807.09 J5.35@1325.62,807.09
  Top Layer w9.84: R30.2@354.13,541.44 R35.2@400.19,541.44
  Top Layer w12: J6.35@91.7,137.8 v1(91.7,181.44) ; v1(153.66,869.05) 183.43,839.28 J6.33@183.43,807.09 ; C16.1@155.57,73.44 162.61,73.44 162.61,42.92 162.61,28.44 C55.2@157.98,28.44 ; C33.1@157.98,-19.56 v1(157.98,4.44) ; v1(173.42,449.63) 174.38,449.63 J6.39@174.38,472.44 ; v1(180.66,229.44) 207.47,208.66 J6.38@212.96,208.66 ; J6.34@183.43,137.8 196.66,137.8 v2(237.66,184.44) ; J6.37@212.96,736.22 225.71,736.22 v1(242.76,753.28) ; U13.9@294.66,40.44 U13.9@297.66,43.44 297.66,50.24 306.26,58.84 ; C53.1@305.35,649.44 309.98,649.44 309.98,700.44 C54.1@305.35,700.44 305.35,717.13 v1(312.66,724.44) ; R32.2@313.41,466.18 v1(313.19,421.44) R17.2@313.19,358.44 313.19,350.98 362.2,301.97 405.21,301.97 R11.2@405.21,292.44 ; R58.1@315.62,912.09 315.62,868.44 304.46,857.28 304.46,786.69 311.54,779.61 311.54,725.56 v1(312.66,724.44) ; v1(342.66,100.44) 349.25,81.83 U13.8@356.72,81.83 316.36,81.83 ; C20.2@357.28,713.43 357.29,721.41 v1(312.66,724.44) ; v1(380.98,643.78) C21.1@400.98,643.7 ; v1(386.51,1006.85) 446.85,1006.85 J1.12@446.85,986.22 v1(546.66,986.22) ; R12.2@400.09,201.4 400.19,220.44 ; R11.2@400.09,301.58 405.21,298.44 R11.2@405.21,292.44 ; R10.2@400.19,151.44 400.19,220.44 ; R29.2@400.19,358.44 400.19,360.51 v1(379.19,379.44) 396.35,405.84 396.35,412.44 C60.1@400.98,412.44 401.32,412.44 R33.2@401.54,466.84 ; R21.2@400.19,799.44 v1(400.19,877.44) ; v1(414.58,902) 446.94,902 446.94,891.45 J1.16@447.09,891.31 ; R53.2@444.94,103.03 447.53,100.44 v1(468.66,100.44) 471.66,103.44 R8.2@496.16,101.11 ; C56.2@452.35,22.44 452.35,13.44 471.66,-5.87 v1(471.66,-7.56) 455.35,-23.48 C98.1@455.35,-25.56 ; v1(488.77,358.44) 491.77,361.44 550.42,361.44 U1.G1@551.18,362.2 ; R7.2@496.19,154.44 496.19,181.06 532.69,217.56 v1(532.69,218.09) U1.L1@551.18,236.22 ; U6.8@531.06,785.76 U6.3@531.06,825.13 531.06,840.59 543.31,852.84 J1.8@543.31,879.92 543.31,922.44 v2(543.66,922.44) ; U1.A1@551.18,551.18 v1(566.93,535.43) U1.B2@582.68,519.69 ; v1(566.3,438.2) U1.E2@582.68,425.2 ; v2(573.66,79.44) 583.98,69.13 C57.1@583.98,-28.56 583.98,-24.24 599.3,-8.92 U9.13@599.3,29.53 592.98,29.53 575.41,42.84 v1(575.41,49.47) 580.61,49.21 U9.12@599.3,49.21 ; U1.L2@582.68,236.22 v1(597.55,219.58) U1.L3@614.17,236.22 ; v1(598.31,252.08) U1.K3@614.17,267.72 ; U9.11@599.3,68.9 624.66,68.9 v1(627.66,70.44) ; U9.10@599.3,88.58 589.67,84.13 574.52,79.69 574.52,83.49 U9.9@599.3,108.27 ; v1(629.32,535.98) U1.B4@645.67,519.69 ; U1.K4@645.67,267.72 v1(660.64,253) ; J1.14@649.61,986.22 J1.13@759.84,986.22 807.78,986.22 v1(807.78,1001.98) 809.94,1001.98 810.19,1001.74 J1.11@968.5,985.44 ; C49.1@664.98,658.44 670.47,650.84 v1(670.47,613.94) ; v2(665.77,71.57) 651.66,57.46 U9.15@651.66,16.54 651.66,-7.56 v1(657.66,-13.56) 676.98,-24.61 C58.1@676.98,-28.56 ; Y1.4@683.85,787.11 701.97,785.14 v1(717.66,769.44) ; U1.L6@708.66,236.22 v1(724.33,222.16) ; U1.E6@708.66,425.2 v1(724.28,410.14) ; v1(726.66,878.17) 755.91,878.17 J1.5@755.91,879.92 ; U1.D7@740.16,456.69 v1(755.91,472.44) U1.D8@771.65,456.69 ; U1.B7@740.16,519.69 v1(756.42,535.95) ; U1.B8@771.65,519.69 v1(787.4,537.39) U1.B9@803.15,519.69 ; U1.A8@771.65,551.18 v1(783.66,571.44) ; C50.2@788.35,658.44 788.35,683.04 780.93,690.46 780.93,722.14 Y1.2@770.47,720.18 770.47,733.96 785.23,733.96 v1(819.66,748.44) ; U1.L11@866.14,236.22 v1(884.35,220.47) ; U1.G11@866.14,362.2 v1(881.03,347.88) ; v2(878.74,997.22) 973.76,997.77 968.5,992.51 J1.11@968.5,985.44 ; C22.1@897.23,-25.22 v1(900.43,-0.26) C59.1@897.23,25.71 ; J1.15@911.09,899.31 922.01,899.31 v1(922.01,855.82) ; v1(948.66,670.44) 988.28,670.44 U7.2@1002.63,655.08 ; C25.1@974.87,808.44 974.87,885.03 v1(989.81,887.18) ; v1(990.38,217.46) 1008.36,235.44 1047.66,235.44 1065.66,253.44 1083.09,253.44 v1(1086.09,239.93) ; C12.1@1010.35,401.84 C12.1@1011.33,401.84 ; C40.2@1010.35,501.69 C40.2@1011.76,501.69 ; v1@1011.76,526.44 v1(1014.66,526.44) ; v1(1012.37,1010.53) 968.5,1010.53 J1.11@968.5,986.22 J1.11@968.5,985.44 ; v1(1054.53,161.82) 1080.37,126.85 1076.47,126.85 U14.2@1069.4,124.02 1107.84,164.54 1151.74,208.44 ; C51.1@1096.32,807.38 1190.63,807.38 v1@1221.66,838.41 ; v2@1170.66,208.44 1170.88,208.66 J5.37@1204.36,208.66 ; J5.38@1204.36,736.22 1214.64,736.22 v2(1223.53,766.01) ; v1(1221.66,841.44) v1@1221.66,838.41 ; J5.33@1233.89,137.8 1236.4,137.8 v2(1245.16,91.22) ; J5.34@1233.89,807.09 1221.66,807.09 v1@1221.66,838.41 ; R67.1@1234.42,902.96 1236.71,905.26 v2(1236.71,937.38) ; J5.39@1242.94,472.44 v1(1242.94,496.44) ; J5.36@1325.62,137.8 v1(1345.78,181.41) ; 306.26,58.84 280.06,58.84 276.66,55.44 v2(276.66,88.44) 314.86,88.44 316.36,86.94 316.36,81.83 ; 306.26,58.84 316.36,68.94 316.36,81.83 ; 400.19,220.44 R16.2@400.19,253.44 405.21,253.44 R11.2@405.21,292.44
  Top Layer w19.68: v1(1137.66,208.44) 1151.74,208.44 v2@1170.66,208.44
  Top Layer w21.65: C40.2@1011.76,501.69 v1@1011.76,526.44
  Top Layer w23.62: v2(294.66,-25.56) U13.9@294.66,40.44 ; C12.1@1010.35,401.84 C7.1@1010.35,457.44 C40.2@1010.35,501.69 ; C13.1@1011.33,356.84 C12.1@1011.33,401.84
  Bottom Layer w5.6: R31.2@412.19,283.46 R31.2@412.19,289.44 ; R36.2@412.19,445.44 412.19,443.87 432.66,423.39 432.66,413.49 453.13,393.02 R28.2@453.13,391.44 ; v1(1140.66,733.44) U4.13@1161.32,721.45
  Bottom Layer w12: C15.1@89.35,631.44 270.13,631.44 v1(336.66,564.91) ; v1(153.66,869.05) 153.66,842.47 U2.4@156.39,839.74 ; C2.2@273.29,13.44 270.85,13.44 270.85,1.44 294.66,-22.37 v2(294.66,-25.56) ; v1(379.19,379.44) 412.98,338.42 C3.1@412.98,337.44 412.19,336.65 R31.2@412.19,289.44 ; v1(380.98,643.78) 429.94,643.78 442.98,636.41 C35.1@442.88,629.56 ; R19.2@412.19,228.35 R31.2@412.19,289.44 ; R31.2@412.19,283.46 R31.2@412.19,289.44 ; R36.2@412.19,445.44 R37.2@412.19,502.44 ; C4.1@452.35,13.44 452.35,11.38 v1(471.66,-7.56) ; R28.2@453.13,391.44 455.77,391.44 v1(488.77,358.44) 511.98,372.68 C14.1@511.98,376.44 ; C1.1@482.35,736.44 481.74,736.44 481.74,739.02 509.16,766.44 v1(528.66,766.44) 544.32,750.78 544.32,740.1 C27.1@547.98,736.44 ; R4.1@482.83,847.73 543.66,908.56 v2(543.66,922.44) ; C11.1@511.98,568.44 511.98,575.14 559.28,622.44 C30.2@553.07,643.25 559.28,651.12 620.45,712.29 620.45,720.41 v1(634.62,734.58) 648.49,748.44 684.66,748.44 ; C94.1@595.98,115.44 C5.1@595.98,190.44 ; C5.1@595.98,187.44 C5.1@595.98,190.44 ; v1(597.55,219.58) 595.98,218 C5.1@595.98,190.44 ; v1(657.66,-13.56) v1@660.45,-13.56 ; C28.1@661.98,22.44 661.98,-13.56 v1@660.45,-13.56 ; v1(670.47,613.94) 670.47,628.14 729.63,687.29 729.29,687.63 C18.2@729.29,694.44 724.98,698.76 C18.2@724.98,708.13 ; v2(722.14,900.78) 747.12,900.78 C43.1@762.64,867.43 ; v1(724.28,410.14) 724.28,379.44 C9.1@862.98,379.44 862.98,377.41 871.87,368.63 871.87,357.03 v1(881.03,347.88) 867.61,323.04 867.61,316.44 C26.1@862.98,316.44 ; v1(726.66,878.17) C43.1@762.64,867.43 ; v2(728.33,855.34) 762.64,855.34 C43.1@762.64,867.43 ; C10.1@748.98,442.44 753.61,442.44 753.61,449.04 v1(755.91,472.44) ; v1(756.42,535.95) 730.15,562.22 723.95,562.22 721.24,564.93 C31.1@721.24,567.54 721.24,576.13 757.16,612.04 C19.1@757.16,620.39 ; R61.1@780.8,2.13 749.22,-29.44 676.34,-29.44 v1@660.45,-13.56 ; v1(807.78,1001.98) 885.66,987.03 897.41,987.03 Q1.2@914.19,970.25 ; C23.1@869.35,181.44 879.95,181.44 879.95,206.71 v1(884.35,220.47) ; C6.1@902.34,563.78 v1(978.66,568.44) ; R20.2@903.13,691.44 924.13,670.44 v1(948.66,670.44) 984.94,670.44 1021.98,633.41 C38.1@1023.91,619.44 ; v2(938.2,740.1) 995.55,797.44 1010.67,797.44 C67.1@1011.2,796.91 ; C8.1@982.22,619.44 C38.1@1023.91,619.44 ; C96.1@989.35,250.44 989.35,217.46 v1(990.38,217.46) ; C97.1@989.35,316.44 C95.1@989.18,414.44 984.72,421.44 C24.1@984.72,472.44 ; C24.1@989.35,472.44 C24.1@984.72,472.44 ; C29.1@989.35,523.53 988.49,524.39 C29.1@987.6,524.39 ; Q2.2@991.24,38.34 1013.75,15.83 v2(1013.75,-15.58) ; v1(1014.66,526.44) 1012.96,526.24 1011.96,525.25 988.46,525.25 C29.1@987.6,524.39 ; R18.2@1018.19,673.44 1021.19,631.44 C38.1@1023.91,619.44 ; U4.6@1112.11,632.87 1112.11,614.97 1137.66,614.97 v1(1137.66,619.44) 1137.27,619.83 1137.27,620.63 1152.12,635.48 1152.12,653.2 U4.11@1169.58,670.66 ; v1(1140.66,733.44) 1161.66,733.44 1169.58,725.52 U4.11@1169.58,670.66 ; U4.12@1181,721.45 1188.66,721.45 ; v3(1203.66,496.44) 1203.66,514.44 ; Q3.2@1210.16,99.33 1237.05,99.33 v2(1245.16,91.22) ; v1(1221.66,841.44) 1220.86,867.74 1220.86,886.44 C34.1@1218.53,877.4 1236.71,895.59 v2(1236.71,937.38) ; v2(1223.53,766.01) v2@1223.53,771.86 ; v1(1242.94,496.44) 1239.94,493.44 1224.66,493.44 1203.66,514.44 ; C39.1@1318.36,235.6 v1(1329.71,259.63) C52.1@1318.36,283.74 ; R63.1@1319.14,181.63 1345.55,181.63 v1(1345.78,181.41) ; C37.1@1337.07,754.67 v1(1389.66,745.44) 1388.09,743.87 1338.92,793.04 1338.92,793.44 C36.2@1337.07,802.67 ; C32.2@1366.03,625.98 v1(1425.66,628.44) ; C24.1@984.72,472.44 984.72,523.53 986.74,523.53 C29.1@987.6,524.39 ; U4.11@1169.58,670.66 U4.11@1171.16,672.24 1188.66,672.24 1188.66,529.44 1203.66,514.44
  Bottom Layer w21.65: C18.2@729.63,687.29 729.63,664.67 757.16,637.14 C19.1@757.16,620.39
  Bottom Layer w23.62: 684.66,748.44 C18.2@724.98,708.13 ; 1188.66,721.45 1188.66,753.62 1198.85,763.81 1198.85,771.86 ; C17.1@1198.84,796.91 1198.85,771.86 ; v2@1223.53,771.86 1198.85,771.86
  other v1: 970.74,74.66 175,359.32 109.52,390.19 260.02,451.09 1105.84,592.06 651.28,824.97
  other v2: 973.5,174 1165.18,207.82 86.12,276.38 1370.04,375.88 38.78,488.92 109.73,845.01